# EAGLE board Servo-Driver-new v45 (EAGLE 9.7.0)
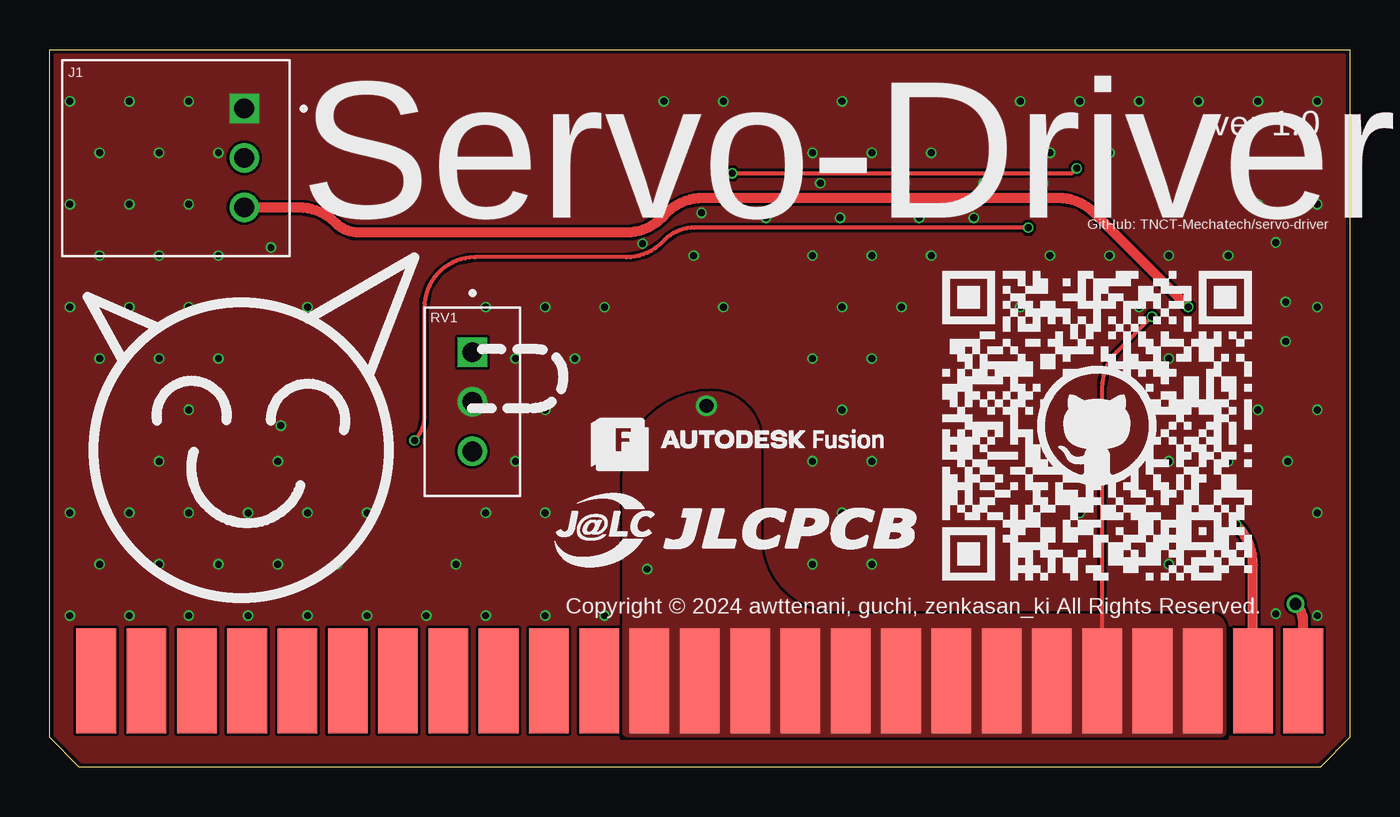
[diagram p0: board, top side]
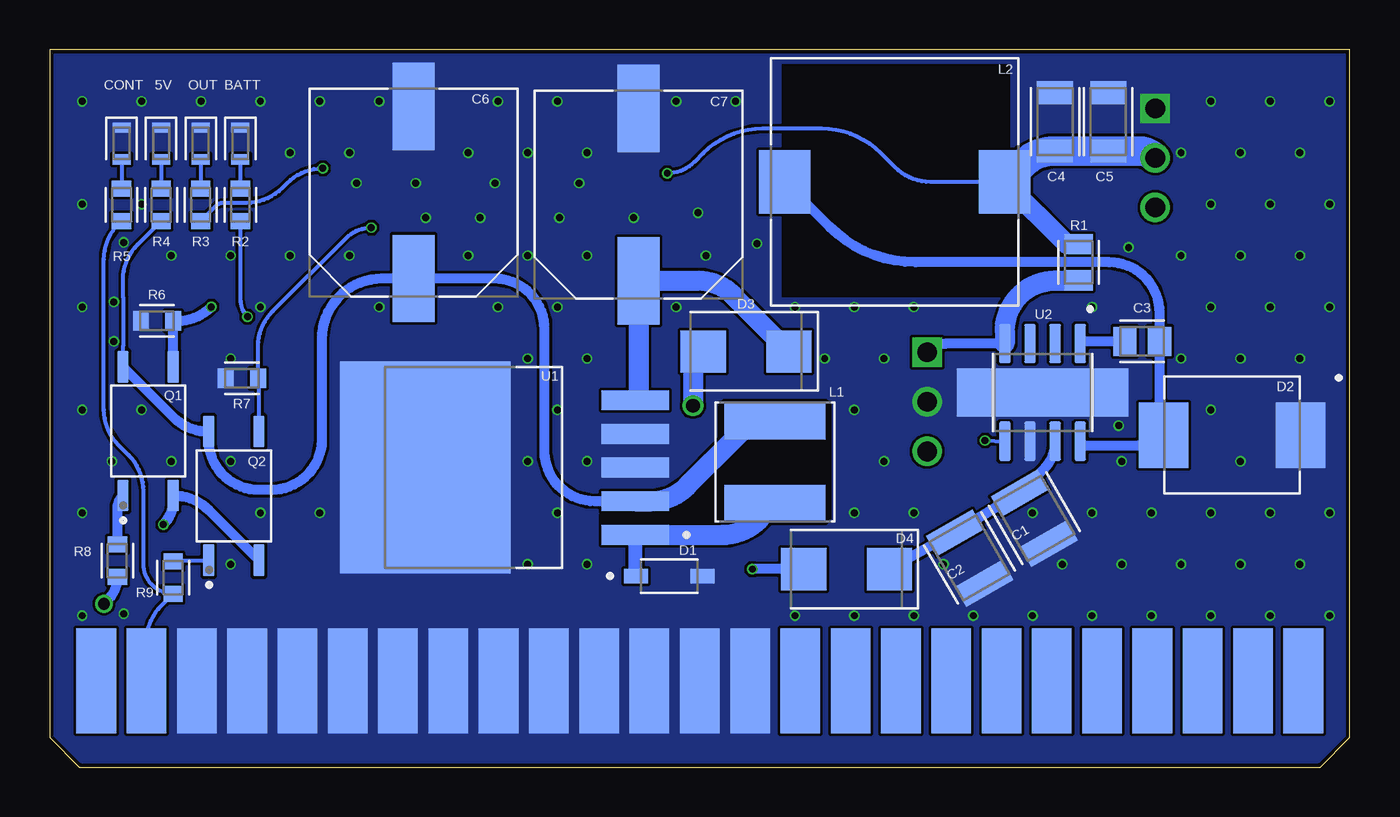
[diagram p1: board, bottom side, seen from below]

Size 65.68 x 36.25 mm. Coordinates in mm from the lower left corner, seen from the top.
Outline: 65.68,1.5 64.18,0 1.5,0 0,1.5 0,36.25 65.68,36.25 65.68,1.5
Copper layers (1*16): Top / Bottom
Stack-up Default Layer Stack: Top User Defined 0.035559375mm / Dielectric-1 User Defined 1.6mm / Bottom User Defined 0.035559375mm
Design rules: minimum copper width 5mil, minimum drill size 12mil, copper clearance wire_polygon to wire_polygon 5mil, copper clearance wire_polygon to pad_smd 5mil, copper clearance wire_polygon to via 5mil, copper clearance pad_smd to pad_smd 5mil, copper clearance pad_smd to via 5mil, copper clearance via to via 5mil, copper clearance smd to pad (same net) 5mil, copper clearance smd to via (same net) 5mil, copper clearance smd to smd (same net) 5mil, dimension clearance 8mil, via restrict clearance 0mil, restrict clearance 0mil, drill distance 6mil, keepout clearance 0mil

## Footprints (pad centres in the part's own frame; a part is rotated, then mirrored left to right if it is on the bottom)
LEDC1608X39N_G = smd 0.512 x 0.912: 1 -0.8,0; 2 0.8,0
LEDC1608X39N_R = smd 0.512 x 0.912: 1 -0.8,0; 2 0.8,0
CAPC3225X135 = smd 1.165 x 2.715: 1 -1.475,0; 2 1.475,0
CAPC2012X110 = smd 1.165 x 1.465: 1 -0.875,0; 2 0.875,0
CAPC3216X135 = smd 1.165 x 1.815: 1 -1.475,0; 2 1.475,0
CAPAE1030X1050N = smd 4.416 x 2.115: 1 -4.353,0; 2 4.353,0
SOD3715X145N = smd 1.21 x 0.73: A 1.68,0; C -1.68,0
DIO_B340-13-F = smd 2.5 x 3.3: A -3.45,0; C 3.45,0
DIOM5336X265N = smd 2.284 x 2.124: 1 -2.164,0; 2 2.164,0
10046971-019LF = smd 2 x 5.3: P$1 -30.48,0; P$2 -27.94,0; P$3 -25.4,0; P$4 -22.86,0; P$5 -20.32,0; P$6 -17.78,0; P$7 -15.24,0; P$8 -12.7,0; P$9 -10.16,0; P$10 -7.62,0; P$11 -5.08,0; P$12 -2.54,0; P$13 0,0; P$14 2.54,0; P$15 5.08,0; P$16 7.62,0; P$17 10.16,0; P$18 12.7,0; P$19 15.24,0; P$20 17.78,0; P$21 20.32,0; P$22 22.86,0; P$23 25.4,0; P$24 27.94,0; P$25 30.48,0 | smd 2 x 5.3 bottom: P$26 30.48,0; P$27 27.94,0; P$28 25.4,0; P$29 22.86,0; P$30 20.32,0; P$31 17.78,0; P$32 15.24,0; P$33 12.7,0; P$34 10.16,0; P$35 7.62,0; P$36 5.08,0; P$37 2.54,0; P$38 0,0; P$39 -2.54,0; P$40 -5.08,0; P$41 -7.62,0; P$42 -10.16,0; P$43 -12.7,0; P$44 -15.24,0; P$45 -17.78,0; P$46 -20.32,0; P$47 -22.86,0; P$48 -25.4,0; P$49 -27.94,0; P$50 -30.48,0
JST_S3B-XH-A(LF)(SN) = drill 1 square: 1 2.5,-3.45 | drill 1: 2 0,-3.45; 3 -2.5,-3.45
IND_VLS6045EX-331M = smd 1.9 x 5.1: 1 -2.1,0; 2 2.1,0
IND_SLF12565T-470M2R4-PF = smd 2.6 x 3.2: 1 -5.55,0; 2 5.55,0
LEDC1608X39N_B = smd 0.512 x 0.912: 1 -0.8,0; 2 0.8,0
SOIC254P700X230-4N = smd 1.61 x 0.57: 1 -3.25,1.27; 3 -3.25,-1.27; 4 3.25,-1.27; 6 3.25,1.27
RESC2012X65 = smd 1.031 x 1.42: 1 -0.919,0; 2 0.919,0
RESC1608X60 = smd 0.799 x 0.974: 1 -0.815,0; 2 0.815,0
TRIM_PV36W502C01B00 = drill 1 square: 1 -2.5,0 | drill 1: 2 0,0; 3 2.5,0
VREG_TPS79625KTTR = smd 3.4 x 1: 1 -10.6,3.4; 2 -10.6,1.7; 3 -10.6,0; 4 -10.6,-1.7; 5 -10.6,-3.4 | smd 8.6 x 10.7: 6 0,0
SOIC127P599X175-9N = smd 1.97 x 0.58: 1 -2.47,1.905; 2 -2.47,0.635; 3 -2.47,-0.635; 4 -2.47,-1.905; 5 2.47,-1.905; 6 2.47,-0.635; 7 2.47,0.635; 8 2.47,1.905 | smd 2.413 x 8.645: 9 0,0

## Placement (x,y rotation side)
5V  LED_CHIP_GREEN-1608  [LEDC1608X39N_G]  60.04,31.5 270 bottom
BATT  LED_CHIP_RED-1608  [LEDC1608X39N_R]  56.04,31.5 270 bottom
C1  4.7u  [CAPC3225X135]  15.94,12.57 300 bottom
C2  4.7u  [CAPC3225X135]  19.21,10.57 300 bottom
C3  10n  [CAPC2012X110]  10.49,21.51 0 bottom
C4  47u  [CAPC3216X135]  14.9,32.6 90 bottom
C5  47u  [CAPC3216X135]  12.21,32.6 90 bottom
C6  330u  [CAPAE1030X1050N]  47.29,29.03 90 bottom
C7  100u  [CAPAE1030X1050N]  35.93,28.92 90 bottom
CONT  LED_CHIP_GREEN-1608  [LEDC1608X39N_G]  62.04,31.5 270 bottom
D1  1N5819HW-7  [SOD3715X145N]  34.38,9.65 0 bottom
D2  B550C  [DIO_B340-13-F]  5.96,16.77 0 bottom
D3  ZENER  [DIOM5336X265N]  30.5,21 180 bottom
D4  ZENER  [DIOM5336X265N]  25.43,10 180 bottom
EDGE1  10046971_019LF  [10046971-019LF]  32.84,4.35 0 top
J1  S3B-XH-A(LF)(SN)  [JST_S3B-XH-A(LF)(SN)]  6.39,30.77 90 top
L1  SMNR6045-331MT 330uF  [IND_VLS6045EX-331M]  29.04,15.41 270 bottom
L2  SLF12565T-470M2R4-PF  [IND_SLF12565T-470M2R4-PF]  23,29.56 180 bottom
OUT  LED_CHIP_BLUE-1608  [LEDC1608X39N_B]  58.04,31.5 270 bottom
Q1  TLP185(E)  [SOIC254P700X230-4N]  60.7,16.97 90 bottom
Q2  TLP185(E)  [SOIC254P700X230-4N]  56.37,13.7 90 bottom
R1  10k  [RESC2012X65]  13.7,25.5 270 bottom
R2  1.5k  [RESC1608X60]  56.04,28.4 90 bottom
R3  330  [RESC1608X60]  58.04,28.4 90 bottom
R4  150  [RESC1608X60]  60.04,28.4 90 bottom
R5  150  [RESC1608X60]  62.04,28.4 90 bottom
R6  4.7k  [RESC1608X60]  60.25,22.54 180 bottom
R7  4.7k  [RESC1608X60]  55.96,19.64 180 bottom
R8  430  [RESC1608X60]  62.25,10.43 270 bottom
R9  430  [RESC1608X60]  59.43,9.57 270 bottom
RV1  T93YA502JT20  [TRIM_PV36W502C01B00]  21.36,18.45 270 top
U1  LM2575S-5.0  [VREG_TPS79625KTTR]  46.7,15.13 180 bottom
U2  RT8289GSP  [SOIC127P599X175-9N]  15.53,18.93 270 bottom

## Library data of the parts
5V CONT = Tutorial - Fusion 360; CATEGORY: Opto-Electronic; COLOR: Green; SUB-CATEGORY: LED
BATT = Tutorial - Fusion 360; CATEGORY: Opto-Electronic; COLOR: Red; SUB-CATEGORY: LED
C1 C2 C4-C7 = Capacitor; CATEGORY: Capacitor
C3 = Tutorial - Fusion 360; CATEGORY: Capacitor
D1 = 1N5819HW-7; AVAILABILITY: In Stock; CHECK_PRICES: https://www.snapeda.com/parts/1N5819HW-7/Diodes+Inc./view-part/?ref=eda; DESCRIPTION: Diode Schottky 40 V 1A Surface Mount SOD-123; MF: Diodes Inc.; MP: 1N5819HW-7; PACKAGE: SOD-123 Fairchild Semiconductor; PRICE: None; PURCHASE-URL: https://www.snapeda.com/api/url_track_click_mouser/?unipart_id=51510&manufacturer=Diodes Inc.&part_name=1N5819HW-7&search_term=1n5819; SNAPEDA_LINK: https://www.snapeda.com/parts/1N5819HW-7/Diodes+Inc./view-part/?ref=snap
D2 = B550C-13-F (1)
D3 D4 = Diode; CATEGORY: Diode; SUB-CATEGORY: Zener
EDGE1 = driveunit
J1 = S3B-XH-A_LF__SN_; AVAILABILITY: In Stock; CHECK_PRICES: https://www.snapeda.com/parts/S3B-XH-A(LF)(SN)/JST+Sales+America+Inc./view-part/?ref=eda; DESCRIPTION: Connector Header Through Hole, Right Angle 3 position 0.098 (2.50mm); MF: JST Sales America Inc.; MP: S3B-XH-A(LF)(SN); PACKAGE: Custom Package JST Sales; PRICE: None; SNAPEDA_LINK: https://www.snapeda.com/parts/S3B-XH-A(LF)(SN)/JST+Sales+America+Inc./view-part/?ref=snap
L1 = VLS6045EX-331M; AVAILABILITY: Not in stock; CHECK_PRICES: https://www.snapeda.com/parts/VLS6045EX-331M/TDK/view-part/?ref=eda; DESCRIPTION: 330 µH Shielded Drum Core, Wirewound Inductor 470 mA 1.44Ohm Nonstandard; MF: TDK Corporation; MP: VLS6045EX-331M; PACKAGE: NON STANDARD-2 TDK; PRICE: None; PURCHASE-URL: https://www.snapeda.com/api/url_track_click_mouser/?unipart_id=3218107&manufacturer=TDK Corporation&part_name=VLS6045EX-331M&search_term=inductor 330; SNAPEDA_LINK: https://www.snapeda.com/parts/VLS6045EX-331M/TDK/view-part/?ref=snap
L2 = SLF12565T-470M2R4-PF; AVAILABILITY: In Stock; CHECK_PRICES: https://www.snapeda.com/parts/SLF12565T-470M2R4-PF/TDK/view-part/?ref=eda; DESCRIPTION: 47 µH Shielded Drum Core, Wirewound Inductor 2.8 A 69.4mOhm Max Nonstandard; MF: TDK; MP: SLF12565T-470M2R4-PF; PACKAGE: NON STANDARD-2 TDK; PRICE: None; PURCHASE-URL: https://www.snapeda.com/api/url_track_click_mouser/?unipart_id=1503656&manufacturer=TDK&part_name=SLF12565T-470M2R4-PF&search_term=slf12565t-470m2r4-pf; SNAPEDA_LINK: https://www.snapeda.com/parts/SLF12565T-470M2R4-PF/TDK/view-part/?ref=snap
OUT = Tutorial - Fusion 360; CATEGORY: Opto-Electronic; COLOR: Blue; SUB-CATEGORY: LED
Q1 Q2 = TLP185_E_; AVAILABILITY: In Stock; CHECK_PRICES: https://www.snapeda.com/parts/TLP185(E)/Toshiba+Semiconductor+and+Storage/view-part/?ref=eda; DESCRIPTION: Optoisolator Transistor Output 3750Vrms 1 Channel 6-SO, 4 Lead; MF: Toshiba; MP: TLP185(E); PACKAGE: SO-6 Toshiba; PRICE: None; SNAPEDA_LINK: https://www.snapeda.com/parts/TLP185(E)/Toshiba+Semiconductor+and+Storage/view-part/?ref=snap
R1-R9 = Resistor; CATEGORY: Resistor; SUB-CATEGORY: Fixed
RV1 = PV36W502C01B00; AVAILABILITY: In Stock; CHECK_PRICES: https://www.snapeda.com/parts/PV36W502C01B00/Bourns/view-part/?ref=eda; DESCRIPTION: 5 kOhms 0.5W, 1/2W PC Pins Through Hole Trimmer Potentiometer Cermet 25.0 Turn Top Adjustment; MF: Bourns; MP: PV36W502C01B00; PACKAGE: PV36W Bourns; PRICE: None; SNAPEDA_LINK: https://www.snapeda.com/parts/PV36W502C01B00/Bourns/view-part/?ref=snap
U1 = LM2575S-5.0; AVAILABILITY: In Stock; CHECK_PRICES: https://www.snapeda.com/parts/LM2575S-5.0/Texas+Instruments/view-part/?ref=eda; DESCRIPTION: SIMPLE SWITCHER 1A Step-Down Voltage Regulator 5-DDPAK/TO-263 -40 to 125; MF: Texas Instruments; MP: LM2575S-5.0; PACKAGE: TO-263-5 Texas Instruments; PRICE: None; SNAPEDA_LINK: https://www.snapeda.com/parts/LM2575S-5.0/Texas+Instruments/view-part/?ref=snap
U2 = RT8289GSP (2)

## Nets
+5V: C6.1 L1.1 Q1.6 Q2.6 R4.1 U1.2
+9V: C4.1 C5.1 J1.2 L2.1 R1.1 R3.1
+BATT: D3.2 D4.2 EDGE1.P$12 EDGE1.P$13 EDGE1.P$14 EDGE1.P$15 EDGE1.P$16 EDGE1.P$17 EDGE1.P$18 EDGE1.P$19 EDGE1.P$20 EDGE1.P$21 EDGE1.P$22 EDGE1.P$23 R2.1
GND: 5V.1 BATT.1 C1.2 C2.2 C4.2 C5.2 C6.2 C7.2 CONT.1 D1.A D2.C EDGE1.P$28 EDGE1.P$29 EDGE1.P$30 EDGE1.P$31 EDGE1.P$32 EDGE1.P$33 EDGE1.P$34 EDGE1.P$35 EDGE1.P$36 EDGE1.P$37 EDGE1.P$38 EDGE1.P$39 J1.1 OUT.1 R6.2 R7.2 RV1.2 U1.3 U1.4 U1.6 U2.6 U2.9
GND_IN: EDGE1.P$24 Q1.3 Q2.3
N$1: CONT.2 R5.2
N$2: Q2.1 R9.1
N$3: 5V.2 R4.2
N$4: C3.1 U2.1
N$5: BATT.2 R2.2
N$6: D1.C L1.2 U1.1
N$7: R1.2 RV1.1 U2.4
N$8: C3.2 D2.A L2.2 U2.8
N$9: OUT.2 R3.2
N$10: Q1.1 R8.1
N$12: C7.1 D3.1 U1.5
N$13: C1.1 C2.1 D4.1 U2.7
PWM_IN: EDGE1.P$25 R8.2
PWM_OUT: J1.3 Q1.4 R6.1
VCC_IN: EDGE1.P$27 R5.1 R9.2
VCC_OUT: Q2.4 R7.1 U2.5

## Tracks (layer width: path | path; a pad name or v marks a point on that pad's centre or on a via)
+5V
  Bottom 0.2: Q2.6 | R4.1 61.23,26.4 arc-45 61.97,24.6 61.97,23.73 61.94,23.7 61.94,21.3 61.97,21.27 Q1.6
  Bottom 0.5: Q1.6 59.44,17.69 arc-45 Q2.6 57.65,16.54 arc-90 55.11,14 54.47,14 arc-90 51.93,16.54 51.93,21.64 arc90 48.89,24.68 C6.1 43.22,24.68 arc90 40.68,22.14 40.68,15.97 arc-90 38.14,13.43 U1.2
  Bottom 1: U1.2 35.3,13.43 arc-45 33.51,14.17 30.92,16.76 arc45 29.12,17.51 L1.1
+9V  (via drill 0.35)
  Top 0.2: v51.88,30.25 51.63,30 v34.48,30
  Bottom 0.2: L2.1 21.19,29.56 arc45 22.98,30.3 23.69,31.01 arc-45 26.69,32.25 29.67,32.25 arc-45 32.67,31.01 33.11,30.57 arc45 v34.48,30 | v51.88,30.25 arc-45 53.67,29.51 53.94,29.24 arc45 55.73,28.5 56.93,28.5 arc-45 57.26,28.36 R3.1
  Bottom 0.5: 14.31,26.42 arc90 R1.1
  Bottom 1: L2.1 14.31,26.42
  Bottom 1.5: L2.1 16.57,30.43 arc45 C4.1 C5.1 10.69,31.12 arc45 J1.2
+BATT  (via drill 0.35 pad 0.5, 0.7)
  Top 0.2: EDGE1.P$21 53.16,19.18 arc-45 53.9,20.97 v55.68,22.75
  Bottom 0.2: R2.1 56.04,23.62 arc-45 v55.68,22.75
  Bottom 0.5: D4.2 v30.18,10
  Bottom 1: D3.2 arc-45 33.18,19.75 v33.18,18.25
  pour Top (no thermals): 59.43,1.5 59.43,7 arc90 58.68,7.75 39.68,7.75 arc-90 35.93,11.5 35.93,16.5 arc90 33.43,19 arc90 28.93,14.5 28.93,1.5
GND  (via drill 0.35, 0.35 pad 0.5)
  other vias: 29.95,26.44 32.93,28 36.18,27.75 39.93,27.75 43.93,27.75 46.68,27.75 50.18,29.5 47.18,29.5 43.18,29.5 38.93,29.5 11.18,26.25 11.68,17.25 62.43,23.5 61.93,26.5 62.43,21.5 61.93,7.75 64.03,33.63 61.03,33.63 58.03,33.63 55.03,33.63 52.03,33.63 49.03,33.63 43.03,33.63 40.03,33.63 34.03,33.63 31.03,33.63 7.03,33.63 4.03,33.63 1.03,33.63 53.53,31.03 50.53,31.03 44.53,31.03 41.53,31.03 38.53,31.03 8.53,31.03 5.53,31.03 2.53,31.03 64.03,28.43 61.03,28.43 7.03,28.43 4.03,28.43 1.03,28.43 59.53,25.84 56.53,25.84 53.53,25.84 50.53,25.84 44.53,25.84 41.53,25.84 38.53,25.84 32.53,25.84 8.53,25.84 5.53,25.84 2.53,25.84 64.03,23.24 55.03,23.24 49.03,23.24 43.03,23.24 40.03,23.24 34.03,23.24 28.03,23.24 25.03,23.24 22.03,23.24 13.03,23.24 7.03,23.24 4.03,23.24 1.03,23.24 56.53,20.64 41.53,20.64 38.53,20.64 26.53,20.64 23.53,20.64 8.53,20.64 5.53,20.64 2.53,20.64 64.03,18.04 61.03,18.04 40.03,18.04 25.03,18.04 7.03,18.04 62.53,15.44 22.03,7.65 19.03,7.65 16.03,7.65 13.03,7.65 10.03,7.65 7.03,7.65 4.03,7.65 1.03,7.65 25.03,7.65 28.03,7.65 64.03,7.65 2.53,10.25 5.53,10.25 8.53,10.25 11.53,10.25 14.53,10.25 20.53,10.25 38.53,10.25 41.53,10.25 56.53,10.25 1.03,12.85 4.03,12.85 7.03,12.85 10.03,12.85 13.03,12.85 16.03,12.85 22.03,12.85 25.03,12.85 40.03,12.85 52.03,12.85 55.03,12.85 64.03,12.85 5.53,15.44 11.53,15.44 23.53,15.44 38.53,15.44 41.53,15.44 56.53,15.44 59.53,15.44
  pour Bottom (no thermals): -0.57,37.25 -0.57,-0.5 66.18,-0.5 66.18,37.25
  pour Top (rank 5, no thermals): -1.32,38 67.48,38 67.93,37.55 67.93,-2.5 -1.12,-2.5 -1.32,-2.3
GND_IN  (via drill 0.35 pad 0.5)
  Top 0.5: EDGE1.P$24 60.78,10.2 arc45 v59.93,12.25
  Bottom 0.2: Q1.3
  Bottom 0.5: Q2.3 57.63,12.98 arc-45 Q1.3 59.42,13.48 arc45 v59.93,12.25
N$1
  Bottom 0.2: CONT.2 R5.2
N$2
  Bottom 0.2: Q2.1 59.27,10.45 arc-45 R9.1
N$3
  Bottom 0.2: 5V.2 R4.2
N$4
  Bottom 0.5: C3.1 13.35,21.51 arc-45 U2.1
N$5
  Bottom 0.2: BATT.2 R2.2
N$6
  Bottom 0.2: 36.1,9.69 arc-90 D1.C
  Bottom 0.7: U1.1 36.1,9.69
  Bottom 1: U1.1 31.67,11.73 arc-45 29.87,12.47 L1.2
N$7
  Bottom 0.5: U2.4 20.28,21.4 arc-45 RV1.1
  Bottom 1: R1.2 14.89,24.58 arc-90 17.43,22.04 U2.4
N$8
  Bottom 0.2: U2.8 arc-90 13.41,16.25 | 10.68,16.25 10.61,16.25
  Bottom 0.5: L2.2 26.29,27.3 arc-45 21.94,25.5 12.16,25.5 arc90 9.62,22.96 C3.2 9.62,17.31 | 13.41,16.25 10.68,16.25 | 10.61,16.25 D2.A
  Bottom 1: D2.A 9.62,16.77 9.62,17.31
N$9
  Bottom 0.2: OUT.2 R3.2
N$10
  Bottom 0.5: Q1.1 arc-45 62.25,13.04 R8.1
N$12
  Bottom 0.2: 35.93,18.7 U1.5
  Bottom 1: 35.93,18.7 C7.1 32.93,24.57 arc45 31.18,23.84 D3.1
N$13
  Bottom 0.5: U2.7 arc45 15.48,15.04 C1.1 C2.1 D4.1
PWM_IN  (via drill 0.6)
  Top 0.5: v62.93,8.25 arc-45 63.32,7.31 EDGE1.P$25
  Bottom 0.5: R8.2 arc45 62.74,8.44 v62.93,8.25
PWM_OUT  (via drill 0.35)
  Top 0.2: 14.43,27.5 14.4,27.53
  Top 0.5: v57.51,23.24 56.59,24.16 52.75,28.01 arc45 50.95,28.75 32.98,28.75 arc45 31.19,28.01 30.92,27.74 arc-45 29.13,27 15.64,27 arc-45 14.43,27.5 | 14.4,27.53 arc45 12.61,28.27 J1.3
  Bottom 0.5: Q1.4 arc45 59.44,20.23 R6.1 59.21,22.54 arc-45 v57.51,23.24
VCC_IN
  Bottom 0.2: R5.1 62.19,27.44 arc-45 62.93,25.64 62.93,18.05 arc-45 62.19,16.26 61.67,15.74 arc45 60.93,13.95 60.93,10.26 arc-90 R9.2 60.04,8.15 arc-45 60.78,6.35 EDGE1.P$27
VCC_OUT  (via drill 0.35, 0.35 pad 0.5)
  Top 0.2: v49.43,27.25 32.57,27.25 arc45 31.05,26.62 30.92,26.49 arc-45 29.13,25.75 21.47,25.75 arc90 18.93,23.21 18.93,17.71 arc-45 v18.43,16.5
  Bottom 0.2: Q2.4 55.1,19.53 arc-45 R7.1 55.15,21.23 arc45 54.4,23.03 50.71,26.72 arc45 v49.43,27.25 | v18.43,16.5 U2.5
(copper drawn outside any net)
  shapes: Bottom area x5

## Text on the board
SilkscreenTop: Servo-Driver | ver 1.0 | GitHub: TNCT-Mechatech/servo-driver | Ⓡ | Copyright © 2024 awttenani, guchi, zenkasan_ki All Rights Reserved.
200bmp: C:/Users/Gota/Downloads/_E[h (1).bmp | C:/Users/Gota/Downloads/_E[h.bmp